# Altium PCB praline.PcbDoc (part 6 of 8)
Units mm, origin at the board's own origin, x right, y up, seen from the top; angles counter-clockwise.
Board outline 152.4 x 101.6 mm, 6 copper layers (In2.Cu, F.Cu, B.Cu, In1.Cu, In3.Cu, In4.Cu); 581 components, 490 nets, 2812 pads, 953 vias.
Unrouted connection lines stored in the file: 404.
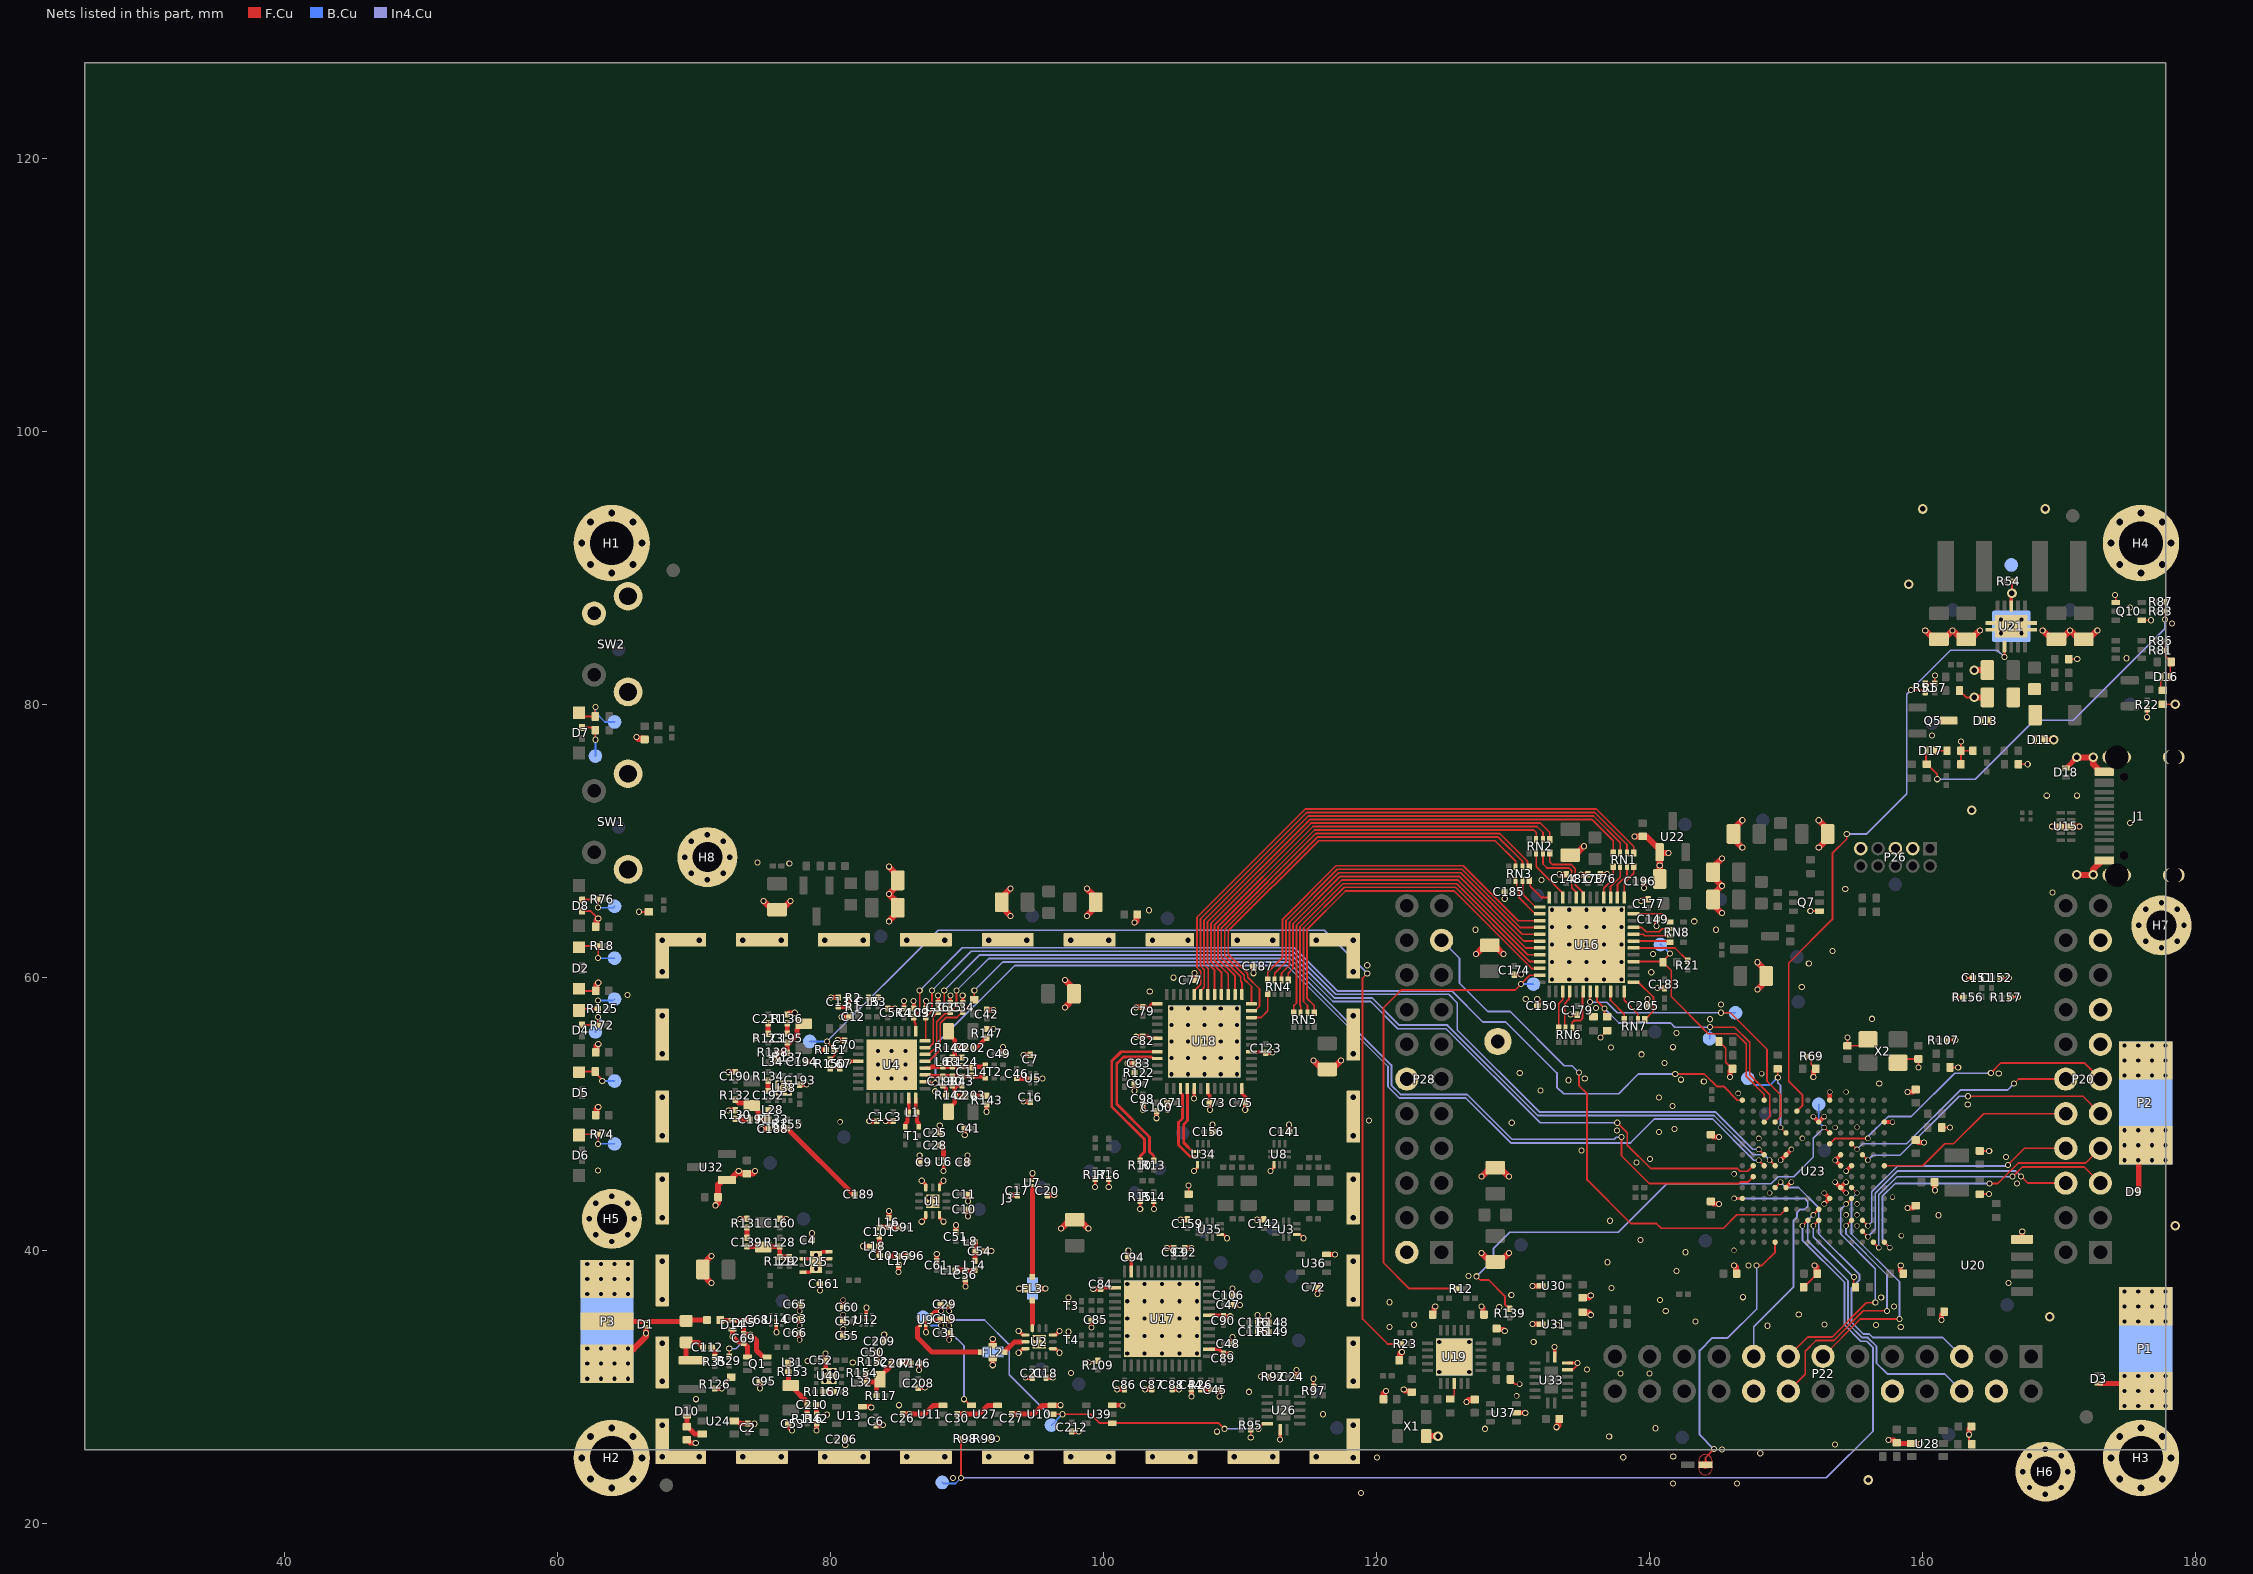
[diagram p8: the nets of this part, all layers, seen from the top]

## Via types
v1: diameter 0.45, hole 0.3, F.Cu to B.Cu, tented both sides, 751 vias
v2: diameter 0.4, hole 0.3, F.Cu to B.Cu, tented both sides, 119 vias
v3: diameter 0.7, hole 0.4, F.Cu to B.Cu, tented both sides, 83 vias

## Nets (pads, with @x,y where several pads share a name; then routed paths per layer and width w, separated by ;. In a path a pad name is that pad's centre, name@x,y a point inside that pad or via, vN(x,y) a via of type N, cw(c..) or ccw(c..) an arc to the next point about the centre after c; other vN are vias at no path point) (continued)
DA7: RN4.5 U18.22 | length 2.7
  F.Cu w0.127: U18.22@110.85,57.07 111.55,57.07 112.05,57.57 RN4.5@112.05,58.82
DBGEN: R64.1 TP24.1 U23.K4 | length 7.6
  F.Cu w0.127: v1(149.4,52.69) R64.1@149.4,53.31 ; v2(149.6,49.02) U23.K4@150,48.62
  In4.Cu w0.127: v1(149.4,52.69) 149.4,52.3 149.6,52.1 v2(149.6,49.02)
  B.Cu w0.127: TP24.1@147.2,52.62 147.69,52.13 148.84,52.13 v1(149.4,52.69)
DD0: RN3.7 U18.23 | length 32
  F.Cu w0.127: U18.23@110.85,57.57 111.11,57.57 111.441,57.901 111.441,59.16 110.58,60.02 110.58,60.268 109.154,61.694 109.154,63.416 115.768,70.03 128.69,70.03 130.2,68.52 RN3.7@130.2,68.12
DD1: RN3.6 U18.24 | length 32
  F.Cu w0.127: U18.24@110.85,58.07 110.85,59.35 110.32,59.88 110.32,60.169 108.9,61.589 108.9,63.521 115.669,70.29 128.93,70.29 130.7,68.52 RN3.6@130.7,68.12
DD2: RN3.5 U18.25 | length 32.1
  F.Cu w0.127: U18.25@110.15,58.77 110.15,59.641 110.06,59.731 110.06,60.07 108.645,61.485 108.645,63.625 115.57,70.55 129.04,70.55 131.07,68.52 131.07,68.25 RN3.5@131.2,68.12
DD3: RN2.7 U18.26 | length 32.3
  F.Cu w0.127: U18.26@109.65,58.77 109.65,60.12 108.39,61.38 108.39,63.73 115.468,70.808 131.512,70.808 131.7,70.62 RN2.7@131.7,70.12
DD4: RN2.6 U18.27 | length 33.2
  F.Cu w0.127: U18.27@109.15,58.77 109.15,60.26 108.135,61.275 108.135,63.845 115.352,71.062 131.758,71.062 132.2,70.62 RN2.6@132.2,70.12
DD5: RN2.5 U18.28 | length 34.2
  F.Cu w0.127: U18.28@108.65,58.77 108.65,60.4 107.881,61.169 107.881,63.981 115.216,71.316 132.004,71.316 132.7,70.62 RN2.5@132.7,70.12
DD6: RN1.8 U18.29 | length 39.9
  F.Cu w0.127: U18.29@108.15,58.77 108.15,60.54 107.626,61.064 107.626,64.086 115.11,71.57 135.8,71.57 137.35,70.02 RN1.8@137.35,69.12
DD7: RN1.7 U18.30 | length 40.8
  F.Cu w0.127: U18.30@107.65,58.77 107.65,59.04 107.69,59.08 107.69,60.64 107.371,60.959 107.371,64.191 115.01,71.83 135.9,71.83 137.85,69.88 RN1.7@137.85,69.12
DD8: RN1.6 U18.31 | length 41.8
  F.Cu w0.127: U18.31@107.15,58.77 107.15,59.03 107.4,59.28 107.4,60.56 107.116,60.844 107.116,64.306 114.9,72.09 136,72.09 138.35,69.74 RN1.6@138.35,69.12
DD9: RN1.5 U18.32 | length 42.9
  F.Cu w0.127: U18.32@106.65,58.77 106.65,59.03 107.14,59.52 107.14,60.46 106.859,60.741 106.859,64.419 114.79,72.35 136.1,72.35 138.85,69.6 RN1.5@138.85,69.12
DIRECTION: RN7.2 U16.12 | length 2.5
  F.Cu w0.127: U16.12@138.15,58.983 138.15,58.33 139.15,57.33 RN7.2@139.15,56.92
DISABLE: RN8.1 U16.23 | length 2.9
  F.Cu w0.127: U16.23@138.837,64.67 140.9,64.67 RN8.1@141.5,64.07
FPGA_CLK: R12.1 TP65.1 U16.47 | length 38.2
  F.Cu w0.127: R12.1@125.88,37.22 122.41,37.22 120.52,39.11 120.52,57.79 121.82,59.09 130.16,59.09 131.24,60.17 U16.47@131.963,60.17
  B.Cu w0.127: v1(130.6,59.53) 131.49,59.53 TP65.1@131.5,59.52
FPGA_CONFIG.CDONE: R45.1 TP48.1 U16.7 U23.L3 | length 23.3
  F.Cu w0.127: U16.7@135.65,58.983 v1(135.65,58.2) 135.65,57.38 R45.1@135.9,57.13 ; v1(145.25,57.42) 145.93,57.42 148.61,54.74 148.61,52.41 149.6,51.42 149.6,49.82 U23.L3@149.2,49.42
  In4.Cu w0.127: v1(135.65,58.2) 136.87,58.2 137.65,57.42 v1(145.25,57.42)
  B.Cu w0.127: v1(145.25,57.42) TP48.1@146.3,57.42
FPGA_CONFIG.{\C\R\E\S\E\T\}\: R40.1 TP50.1 U16.8 U23.M3 | length 21.3
  F.Cu w0.127: U16.8@136.15,58.983 136.15,58.29 v1(136.7,57.74) 136.7,57.33 R40.1@136.9,57.13 ; v1(144.42,56.37) 146.23,56.37 147.34,55.26 147.34,52.88 148.8,51.42 148.8,49.82 U23.M3@148.4,49.42
  In4.Cu w0.127: v1(136.7,57.74) 137.77,56.67 141.55,56.67 141.85,56.37 v1(144.42,56.37)
  B.Cu w0.127: TP50.1@144.4,55.52 144.42,55.54 v1(144.42,56.37)
FPGA_CONFIG.{\S\P\I\_\C\S\}\: R44.1 TP49.1 U16.16 U23.M1 | length 18.4
  F.Cu w0.127: U16.16@138.837,61.17 140.94,61.17 R44.1@140.99,61.12 ; v1(141.51,61.75) 140.99,61.23 R44.1@140.99,61.12 ; U23.M1@148.4,51.02 148.4,51.44 147.08,52.76 147.08,55.15 146.34,55.89 144.31,55.89 141.59,58.61 141.59,60.52 R44.1@140.99,61.12
  B.Cu w0.127: TP49.1@140.8,62.42 140.84,62.42 v1(141.51,61.75)
FPGA_DA0: RN5.1 U16.46 | length 26.9
  F.Cu w0.127: RN5.1@115.45,57.42 115.45,57.95 114.91,58.49 114.91,63.51 117.74,66.34 125.69,66.34 131.36,60.67 U16.46@131.963,60.67
FPGA_DA1: RN5.2 U16.45 | length 27.1
  F.Cu w0.127: RN5.2@114.95,57.42 114.95,57.95 114.656,58.244 114.656,63.626 117.64,66.61 125.79,66.61 131.23,61.17 U16.45@131.963,61.17
FPGA_DA2: RN5.3 U16.44 | length 27.4
  F.Cu w0.127: RN5.3@114.45,57.42 114.45,57.94 114.4,57.99 114.4,63.73 117.55,66.88 125.88,66.88 131.09,61.67 U16.44@131.963,61.67
FPGA_DA3: RN5.4 U16.43 | length 27.8
  F.Cu w0.127: RN5.4@113.978,57.448 RN5.4@113.95,57.42 113.95,57.94 114.146,58.136 114.146,63.836 117.46,67.15 125.97,67.15 130.95,62.17 U16.43@131.963,62.17
FPGA_DA4: RN4.1 U16.42 | length 25.7
  F.Cu w0.127: RN4.1@113.55,59.82 113.55,60.32 113.892,60.662 113.892,63.942 117.36,67.41 126.07,67.41 130.81,62.67 U16.42@131.963,62.67
FPGA_DA5: RN4.2 U16.41 | length 26.2
  F.Cu w0.127: RN4.2@113.05,59.82 113.05,60.32 113.638,60.908 113.638,64.058 117.25,67.67 126.17,67.67 130.67,63.17 U16.41@131.963,63.17
FPGA_DA6: RN4.3 U16.40 | length 26.6
  F.Cu w0.127: RN4.3@112.55,59.82 112.55,60.32 113.383,61.153 113.383,64.173 117.14,67.93 126.27,67.93 130.53,63.67 U16.40@131.963,63.67
FPGA_DA7: RN4.4 U16.39 | length 27
  F.Cu w0.127: RN4.4@112.05,59.82 112.05,60.4 113.128,61.478 113.128,64.278 117.04,68.19 126.37,68.19 130.39,64.17 U16.39@131.963,64.17
FPGA_DD0: RN3.2 U16.38 | length 3.4
  F.Cu w0.127: RN3.2@130.2,67.12 130.28,67.04 130.28,66.654 130.45,66.484 130.45,65.84 131.62,64.67 U16.38@131.963,64.67
FPGA_DD1: RN3.3 U16.37 | length 2.7
  F.Cu w0.127: RN3.3@130.7,67.12 130.71,67.11 130.71,66.11 131.65,65.17 U16.37@131.963,65.17
FPGA_DD2: RN3.4 U16.36 | length 2.2
  F.Cu w0.127: RN3.4@131.2,67.12 131.27,67.05 131.27,66.7 132.112,65.857 U16.36@132.65,65.857
FPGA_DD3: RN2.2 U16.34 | length 4.2
  F.Cu w0.127: RN2.2@131.65,69.12 RN2.2@131.77,69 ; RN2.2@131.7,69.12 131.7,68.12 133.65,66.17 U16.34@133.65,65.857
FPGA_DD4: RN2.3 U16.32 | length 5.2
  F.Cu w0.127: RN2.3@132.2,69.12 132.2,68.32 132.5,68.02 134.12,68.02 134.31,67.83 134.31,66.58 134.65,66.24 U16.32@134.65,65.857
FPGA_DD5: RN2.4 U16.31 | length 5.1
  F.Cu w0.127: RN2.4@132.7,69.12 132.7,68.47 132.89,68.28 134.27,68.28 134.57,67.98 134.57,66.79 135.15,66.21 U16.31@135.15,65.857
FPGA_DD6: RN1.1 U16.28 | length 2.6
  F.Cu w0.127: U16.28@136.65,65.857 136.65,66.53 137.35,67.23 RN1.1@137.35,68.12
FPGA_DD7: RN1.2 U16.27 | length 2.6
  F.Cu w0.127: U16.27@137.15,65.857 137.15,66.67 137.85,67.37 RN1.2@137.85,68.12
FPGA_DD8: RN1.3 U16.26 | length 2.6
  F.Cu w0.127: U16.26@137.65,65.857 137.65,66.8 138.35,67.5 RN1.3@138.35,68.12
FPGA_DD9: RN1.4 U16.25 | length 2.6
  F.Cu w0.127: U16.25@138.15,65.857 138.15,66.93 138.85,67.63 RN1.4@138.85,68.12
FPGA_SGPIO0: RN8.2 U16.21 | length 2.9
  F.Cu w0.127: U16.21@138.837,63.67 139.44,63.67 139.76,63.35 140.71,63.35 140.93,63.57 RN8.2@141.5,63.57
FPGA_SGPIO1: RN8.4 U16.19 | length 2.7
  F.Cu w0.127: U16.19@138.837,62.67 141.4,62.67 RN8.4@141.5,62.57
FPGA_SGPIO2: RN6.2 U16.6 | length 3.3
  F.Cu w0.127: RN6.2@134.35,56.32 134.35,56.72 134.48,56.85 134.94,56.85 135.1,57.01 135.1,58.932 U16.6@135.15,58.983
FPGA_SGPIO3: RN7.1 U16.13 | length 3.8
  F.Cu w0.127: U16.13@138.837,59.67 139.19,59.67 140.29,58.57 140.29,57.56 RN7.1@139.65,56.92
FPGA_SGPIO4: RN7.4 U16.10 | length 2.5
  F.Cu w0.127: U16.10@137.15,58.983 137.15,58.32 138.15,57.32 RN7.4@138.15,56.92
FPGA_SGPIO5: RN6.4 U16.3 | length 2.8
  F.Cu w0.127: RN6.4@133.35,56.32 133.35,58.086 133.65,58.386 U16.3@133.65,58.983
FPGA_SGPIO6: RN6.3 U16.4 | length 2.8
  F.Cu w0.127: RN6.3@133.85,56.32 133.79,56.38 133.79,58.09 134.1,58.4 134.1,58.932 U16.4@134.15,58.983
FPGA_SGPIO7: R21.1 U16.18 | length 4.3
  F.Cu w0.127: U16.18@138.837,62.17 141.87,62.17 R21.1@142.8,61.24
FPGA_SGPIO8: RN8.3 U16.20 | length 2.7
  F.Cu w0.127: U16.20@138.837,63.17 139.55,63.17 139.65,63.07 RN8.3@141.5,63.07
GND: C1.2 C2.2 C3.2 C4.1 C5.2 C6.1 C7.2 C8.2 C9.1 C10.2 C11.1 C12.2 C13.2 C16.1 C17.2 C18.1 C19.1 C20.1 C21.2 C22.2 C23.2 C24.2 C25.2 C26.2 C27.2 C29.1 C30.2 C31.2 C32.2 C33.2 C34.2 C35.2 C36.2 C37.2 C39.2 C40.2 C41.2 C42.2 C43.2 C44.1 C45.1 C47.1 C48.2 C49.1 C51.2 C52.2 C53.2 C54.2 C55.1 C56.2 C57.1 C60.2 C61.2 C63.1 C65.1 C66.2 C69.2 C70.2 C71.2 C72.2 C73.2 C75.2 C77.2 C79.2 C80.2 C81.2 C82.2 C83.2 C84.2 C85.2 C86.2 C87.2 C88.2 C89.2 C90.2 C92.2 C93.2 C94.2 C95.2 C97.2 C98.2 C100.2 C105.2 C106.2 C109.2 C110.2 C113.2 C116.2 C117.2 C118.2 C119.2 C120.2 C121.2 C122.2 C123.2 C124.2 C126.2 C127.2 C128.2 C129.2 C130.2 C131.2 C132.2 C133.2 C134.2 C135.2 C136.2 C137.2 C138.2 C140.2 C141.2 C142.2 C143.2 C144.2 C145.1 C146.1 C147.2 C148.2 C149.2 C150.2 C151.2 C152.2 C154.2 C156.2 C157.2 C158.2 C159.2 C160.2 C161.2 C162.2 C163.2 C164.2 C165.2 C166.2 C167.2 C168.1 C169.2 C170.2 C171.2 C172.2 C173.2 C174.2 C175.2 C176.2 C177.2 C178.2 C179.2 C181.2 C182.2 C183.2 C184.2 C185.2 C186.2 C187.2 C188.2 C190.2 C193.2 C194.2 C196.2 C197.2 C199.2 C200.2 C201.2 C204.2 C205.2 C206.2 C208.2 C209.2 C212.2 D1.2 D2.1 D3.2 D8.2 D9.2 D11.2 D14.2 D18.2 FL2.2 FL2.4 FL3.2 FL3.4 H1.1 H2.1 H3.1 H4.1 H5.1 H6.1 H7.1 H8.1 J1.A1 J1.A12 J1.B1 J1.B12 J1.S1 J3.1 L16.2 L17.2 L18.2 P1.2 P2.2 P3.2 P20.13 P20.15 P20.19 P22.4 P22.10 P22.18 P26.3 P26.5 P26.9 P28.2 P28.12 Q1.1 Q7.1 Q10.1 Q10.4 R4.1 R7.2 R14.2 R15.2 R16.2 R17.2 R20.2 R22.2 R39.2 R40.2 R42.1 R46.1 R51.2 R54.1 R55.1 R57.2 R65.1 R68.2 R69.2 R79.2 R80.2 R82.1 R85.1 R89.2 R91.2 R92.2 R93.2 R95.2 R97.2 R99.2 R101.2 R107.2 R109.2 R113.2 R122.2 R126.1 R130.1 R131.1 R136.1 R143.1 R146.1 R147.2 R148.2 R151.2 R156.2 R157.2 SW1.SH SW2.2 SW2.SH T3.1 T4.1 TP6.1 TP23.1 U1.4 U1.6 U1.10 U1.12 U1.13 U2.4 U2.6 U2.10 U2.12 U2.13 U3.3 U4.12 U4.33 U5.2 U6.2 U7.2 U8.3 U9.6 U9.9 U10.3 U11.3 U12.6 U12.9 U13.3 U14.6 U14.9 U15.3 U15.8 U16.49 U17.2 U17.26 U17.31 U17.47 U17.49 U18.5 U18.7 U18.12 U18.17 U18.37 U18.42 U18.49 U19.21 U20.4 U21.8 U21.11 U22.1 U23.A3 U23.D7 U23.E6 U23.E7 U23.E9 U23.F1 U23.F10 U23.G3 U23.K6 U23.K9 U24.2 U25.3 U25.4 U25.6 U25.8 U25.9 U26.7 U27.3 U28.2 U30.2 U31.2 U32.1 U33.6 U33.7 U33.8 U34.3 U35.3 U36.3 U37.2 U38.7 U39.3 U40.7 X1.2 X2.2 X2.4 | length 269.8
  F.Cu w0.127: D2.1@61.6,59.173 61.753,59.02 C81.2@62.82,59.02 ; D8.2@61.82,64.87 62.46,64.87 v1(63.01,64.32) ; C124.2@62.7,50.04 C124.2@62.82,49.92 ; v1(66,64.82) 66.01,64.81 R7.2@66.7,64.81 ; v1(72.05,29.92) 72.05,30.02 72.75,30.72 R20.2@72.75,30.73 ; R99.2@91.62,26.22 v1(92.2,26.22) ; v1(98.9,31.8) 99.46,31.8 R109.2@99.6,31.94 ; R122.2@102.28,53.02 C83.2@102.28,53.72 ; R113.2@106.25,44.13 v1(106.25,44.77) ; v1(110.8,26.32) R95.2@110.8,26.9 ; v1(111.55,30.77) R92.2@112.13,30.77 ; R97.2@115.4,30.04 v1(115.4,30.62) ; R85.1@129.81,30.57 130.16,30.22 v2(130.49,30.22) ; U33.6@133.988,31.27 134.39,31.27 134.72,31.6 v1(134.72,31.77) ; v1(136.4,55.6) 136.4,55.61 R40.2@136.9,56.11 ; R68.2@145.09,55.32 145.59,54.82 145.59,53.81 C128.2@146.08,53.32 ; R93.2@151.29,37.32 151.29,37.33 C135.2@152.28,38.32 ; R69.2@151.58,54.22 151.84,53.96 151.84,53.66 C133.2@152.18,53.32 ; v1(151.78,64.87) Q7.1@152.45,64.87 ; v1(154.5,55.62) C158.2@154.5,55 155.63,55 X2.2@156,55.37 ; X2.4@158.2,53.67 158.57,54.04 C157.2@159.7,54.04 v1(159.7,53.42) ; R51.2@160.2,81.54 R57.2@160.9,81.54 v1(160.9,82.12) ; R39.2@161.41,49.02 v1(162,49.02) ; R107.2@161.82,55.42 v1(162.4,55.42) ; R82.1@162.01,53.42 v1(162.61,53.42) ; v1(162.4,58.57) R156.2@162.98,58.57 ; R46.1@162.71,81.02 163.21,80.52 v3(163.8,80.52) ; R80.2@162.81,75.62 R91.2@162.81,76.62 ; v1(162.81,77.29) R91.2@162.81,76.62 ; v1(163.08,59.97) C151.2@163.68,59.97 ; v1(163.4,26.52) 163.4,26.03 R101.2@163.61,25.82 ; R79.2@163.69,76.62 R91.2@162.81,76.62 ; C118.2@164.2,44.14 v1(164.87,44.14) ; C164.2@164.2,47.3 v1(164.88,47.3) ; C152.2@165.72,59.97 v1(166.31,59.97) ; R157.2@166.42,58.57 v1(167,58.57) ; v3(166.55,88.14) 166.55,88.95 R54.1@166.62,89.02 ; R65.1@167.02,75.62 v1(167.7,75.62) ; R55.1@170.71,83.32 v1(171.33,83.32) ; v1(174.09,88.03) 174.15,87.97 Q10.4@174.15,87.47 ; Q10.1@176.05,86.17 v1(176.73,86.17) ; v1(176.45,79.07) R22.2@176.45,79.65 ; R89.2@177.6,80.01 178.49,80.01 v3(178.5,80.02)
  F.Cu w0.203: C66.2@77.77,33.97 C66.2@77.87,34.07 ; v1(99.4,44.66) R17.2@99.4,45.24 ; v1(100.4,44.66) R16.2@100.4,45.24 ; v1(102.7,43.06) R15.2@102.7,43.64 ; v1(103.7,43.06) R14.2@103.7,43.64 ; v1(106.64,45.82) 106.9,46.08 U34.3@106.9,46.301 ; U35.3@108.569,41.17 108.79,41.17 v1(109.05,40.91) ; v1(112.24,45.82) 112.5,46.08 U8.3@112.5,46.301 ; U3.3@114.168,41.17 114.39,41.17 v1(114.65,40.91)
  F.Cu w0.25: v1(76.05,34.02) U14.6@76.05,34.52 U14.9@76.05,34.92 ; U25.8@78,38.42 78.49,38.42 78.95,38.88 U25.9@78.95,39.17 ; U25.6@78,39.42 78.7,39.42 U25.9@78.95,39.17 ; U25.3@79.9,39.42 79.2,39.42 U25.9@78.95,39.17 ; U25.4@79.9,39.92 79.41,39.92 78.95,39.46 U25.9@78.95,39.17 ; v1(81.33,53.87) U4.12@82.05,53.87 ; U12.9@82.65,34.92 U12.6@82.65,35.32 v1(82.65,35.82) ; R4.1@85.4,57.74 v1(85.4,58.28) ; C109.2@86.1,57.74 v1(86.1,58.28) ; v1(86.7,42.12) 87,42.42 U1.10@87,42.62 ; v1(86.7,45.12) 87,44.82 U1.6@87,44.62 ; v1(87,34.02) U9.6@87,34.52 U9.9@87,34.92 ; C37.2@87,57.74 v1(87,58.28) ; C36.2@87.9,58.14 v1(87.9,58.68) ; U1.12@88,42.62 88,42.42 v1(88.3,42.12) ; U1.4@88,44.62 88,44.82 v1(88.3,45.12) ; v1(88.3,45.82) U6.2@88.3,46.32 ; C35.2@88.8,58.14 v1(88.8,58.68) ; C34.2@89.7,58.14 v1(89.7,58.68) ; v1(93.8,32.52) 94.1,32.82 U2.12@94.3,32.82 ; v1(93.8,34.12) 94.1,33.82 U2.10@94.3,33.82 ; U7.2@94.8,45.17 v1(94.8,45.67) ; U5.2@95.05,52.62 v1(95.55,52.62) ; U2.4@96.3,32.82 96.5,32.82 v1(96.8,32.52) ; U2.6@96.3,33.82 96.5,33.82 v1(96.8,34.12) ; C84.2@99.8,37.2 99.87,37.27 U17.2@100.863,37.27 ; C94.2@101.83,39.52 101.83,39.44 102.05,39.22 U17.47@102.05,38.457 ; C82.2@102.9,55.69 103.31,55.69 103.43,55.57 U18.42@103.95,55.57 ; C79.2@102.9,57.84 103.34,57.84 103.57,58.07 U18.37@103.95,58.07 ; v1(106.63,51.15) 106.65,51.17 U18.5@106.65,51.87 ; U18.7@107.65,51.87 107.65,51.5 107.78,51.37 C73.2@107.78,50.82 ; U17.26@107.737,32.77 108.47,32.77 C89.2@108.8,32.44 ; U17.31@107.737,35.27 108.72,35.27 C90.2@108.8,35.19 ; U18.12@110.15,51.87 110.15,51.52 110.42,51.25 C75.2@110.42,50.82 ; U18.17@110.85,54.57 111.83,54.57 C123.2@111.9,54.5 ; v1(112.95,26.17) U26.7@112.95,26.882 ; U33.8@133.05,32.207 v1(133.05,32.94) ; U33.7@133.988,31.77 v1(134.72,31.77) ; U21.8@166.5,87.22 166.5,88.09 v3(166.55,88.14)
  F.Cu w0.3: v1(91.45,50.17) R143.1@91.45,50.7 ; R147.2@91.45,56.24 91.47,56.22 v1(91.95,56.22) ; v1@97.46,33.88 v1(97.46,34.06) ; v1@97.46,36.38 v1(97.46,36.56) ; v2(149.6,46.62) U23.K6@150,47.02 v2(150.4,47.42) ; U23.K9@150,44.62 v2(150.4,45.02) ; v2(152,49.82) U23.G3@152.4,49.42 v2(152.8,49.82) ; v2(152.8,43.42) U23.F10@153.2,43.82 v2(152.8,44.22) ; U23.F1@153.2,51.02 v2(153.2,51.62) ; v2(153.6,45.02) U23.E9@154,44.62 ; U23.E7@154,46.22 v2(153.6,46.62) U23.E6@154,47.02 ; v2(154.4,44.22) U23.E9@154,44.62 ; v2(154.4,45.02) U23.E9@154,44.62 ; v2(154.4,45.82) U23.D7@154.8,46.22 ; U23.A3@157.2,49.42 v2(157.8,49.42)
  F.Cu w0.35: U39.3@100.65,28.67 v1(101.4,28.67) ; v1(102.4,55.66) 102.43,55.69 C82.2@102.9,55.69 ; v1(102.4,57.81) 102.43,57.84 C79.2@102.9,57.84 ; C71.2@104.68,50.82 104.68,50.35 v1(104.71,50.32) ; v1(106.69,60.32) 106.72,60.29 C77.2@106.72,59.82 ; C73.2@107.78,50.82 107.78,50.35 v1(107.81,50.32) ; v1(110.39,50.32) 110.42,50.35 C75.2@110.42,50.82 ; C123.2@111.9,54.5 112.37,54.5 v1(112.4,54.53) ; C174.2@130.1,60.2 130.15,60.25 130.58,60.25 v1(130.6,60.23) ; U37.2@130.25,28.12 v1(130.9,28.12) ; v1(131.43,34.62) U31.2@132.05,34.62 ; v1(131.43,37.42) U30.2@132.05,37.42 ; v1(131.78,58.43) 131.83,58.38 131.83,57.98 C150.2@131.79,57.94 ; v1(133.42,67.57) 133.47,67.52 133.87,67.52 C148.2@133.92,67.57 ; v1(134.21,57.3) 134.23,57.32 134.66,57.32 C179.2@134.71,57.27 ; v1(134.99,67.54) 135.01,67.52 135.44,67.52 C178.2@135.49,67.57 ; C176.2@136.4,67.57 136.89,67.57 v1(136.9,67.58) ; v1(139.4,65.61) 139.48,65.69 139.85,65.69 C177.2@139.9,65.74 ; v1(140.52,63.77) 140.5,63.79 140.5,64.22 C149.2@140.55,64.27 ; v1(140.6,59.23) 140.62,59.25 141.05,59.25 C183.2@141.1,59.2
  F.Cu w0.364: C171.2@69.5,26.14 69.72,25.92 v1(70.15,25.92) ; R126.1@71.55,29.9 71.57,29.92 v1(72.05,29.92) ; v1(72.55,50.27) 72.57,50.29 R130.1@73.05,50.29 ; v1(72.55,53.07) 73.03,53.07 C190.2@73.05,53.09 ; 72.85,34.06 v1(72.85,33.72) 73.28,33.29 73.61,33.29 C69.2@73.65,33.25 73.938,32.962 Q1.1@73.938,32.28 ; U24.2@72.96,27.52 73.2,27.52 73.38,27.34 C2.2@73.95,27.34 73.97,27.32 v1(74.45,27.32) ; v1(73.4,42.32) 73.88,42.32 R131.1@73.9,42.34 ; C95.2@74.83,30.42 74.85,30.4 v1(74.85,29.92) ; v1(74.95,48.92) C188.2@75.48,48.92 ; C160.2@76.3,42.34 76.32,42.32 v1(76.8,42.32) ; R136.1@76.85,57.29 76.98,57.42 v1(77.4,57.42) ; C53.2@76.93,27.32 76.93,27.09 v1(77.2,26.82) ; v2(77.75,33.47) 77.75,33.95 C66.2@77.77,33.97 ; v2(77.75,34.52) 77.75,35 C63.1@77.77,35.02 ; v2(77.75,35.57) 77.75,36.05 C65.1@77.77,36.07 ; C193.2@77.75,52.15 77.77,52.17 v1(78.25,52.17) ; C194.2@78.22,53.82 v1(78.75,53.82) ; v1(78.65,41.27) 78.65,40.79 C4.1@78.67,40.77 ; v1(79,26.82) R42.1@79,27.35 ; v1(79.15,54.72) R151.2@79.68,54.72 ; C161.2@79.23,37.57 79.25,37.55 v1(79.25,37.07) ; v1(79.65,32.47) 79.65,31.99 C52.2@79.67,31.97 79.67,31.05 U40.7@79.9,30.82 ; v1(80.06,58.54) C13.2@80.6,58.54 ; v1(80.55,55.42) 81.02,55.42 C70.2@81.05,55.39 ; v1(80.84,57.12) C12.2@81.38,57.12 ; C55.1@80.93,33.77 80.95,33.79 v2(80.95,34.27) ; C57.1@80.93,34.82 80.95,34.84 v2(80.95,35.32) ; C60.2@80.93,35.87 80.95,35.89 v2(80.95,36.37) ; v1(81.1,25.77) 81.1,26.15 C206.2@81.12,26.17 ; U13.3@82.35,28.57 82.95,28.57 v1(83,28.52) ; v1(82.41,40.32) L18.2@82.93,40.32 ; v1(82.86,49.5) C1.2@83.4,49.5 ; C6.1@83.35,27.2 83.37,27.22 v1(83.85,27.22) ; C209.2@83.92,33.37 83.92,33.84 v1(83.95,33.87) ; v1(84.06,49.5) C3.2@84.6,49.5 ; C5.2@84.2,57.74 v1(84.74,57.74) ; L16.2@84.3,42.39 v1(84.3,42.91) ; v1(85,38.43) L17.2@85,38.95 ; C26.2@85.3,28.04 85.32,28.02 v1(85.8,28.02) 86.9,28.02 87.55,28.67 U11.3@88.25,28.67 ; C208.2@86.45,29.95 86.47,29.97 v1(86.95,29.97) ; v1(86.5,31.27) 86.52,31.29 R146.1@86.52,31.77 ; C9.1@86.53,46.47 86.55,46.49 v1(86.55,46.97) ; C61.2@87.8,39.24 v1(87.8,39.76) ; C25.2@88.02,48.62 v1(88.02,49.16) ; v2(88.7,33.47) 88.7,33.95 C31.2@88.72,33.97 ; v2(88.7,34.52) 88.7,35 C19.1@88.72,35.02 ; v2(88.7,35.57) 88.7,36.05 C29.1@88.72,36.07 ; C51.2@89.2,41.34 v1(89.2,41.86) ; C30.2@89.3,28.04 89.32,28.02 v1(89.8,28.02) 90.9,28.02 91.55,28.67 U27.3@92.25,28.67 ; C41.2@89.83,48.97 89.85,48.95 v1(89.85,48.47) ; v1@89.9,37.38 C56.2@89.9,37.9 ; v1(90.05,46.97) 90.05,46.49 C8.2@90.07,46.47 ; v1(90.1,42.52) 90.1,43 C10.2@90.12,43.02 ; v1(90.1,43.62) 90.1,44.1 C11.1@90.12,44.12 ; C54.2@91.27,39.97 v1(91.79,39.97) ; C42.2@91.45,57.64 91.47,57.62 v1(91.95,57.62) ; v1(92.65,54.92) 92.65,54.44 C49.1@92.67,54.42 ; v1(93.2,44.07) 93.68,44.07 C17.2@93.7,44.05 ; C27.2@93.3,28.04 93.32,28.02 v1(93.8,28.02) 94.9,28.02 95.55,28.67 U10.3@96.25,28.67 96.86,28.67 v1(96.87,28.68) ; v1(94.15,50.92) 94.63,50.92 C16.1@94.65,50.9 ; v1(94.15,54.32) 94.63,54.32 C7.2@94.65,54.34 ; v1(94.3,30.72) 94.78,30.72 C21.2@94.8,30.7 ; C18.1@95.8,30.7 95.82,30.72 v1(96.3,30.72) ; C20.1@95.9,44.05 95.92,44.07 v1(96.4,44.07) ; C212.2@97.7,26.75 97.72,26.77 v1(98.2,26.77) ; v1(99.13,34.38) C85.2@99.13,34.92 ; v1(99.26,37.2) C84.2@99.8,37.2 ; v1(101.01,29.85) C86.2@101.55,29.85 ; v1(101.78,53.72) C83.2@102.28,53.72 ; C94.2@101.83,39.52 v1(101.83,40.02) ; v1(102.28,51.71) C97.2@102.28,52.21 ; v1(102.9,50.3) C98.2@102.9,50.8 ; v1(103.05,29.85) C87.2@103.55,29.85 ; v1(103.9,49.7) C100.2@103.9,50.2 ; v1(104.65,40.19) C93.2@105.15,40.19 ; C88.2@105.05,29.85 v1(105.55,29.85) ; v1(105.65,42.26) 106.12,42.26 C159.2@106.15,42.29 ; C92.2@105.95,40.19 v1(106.45,40.19) ; v1(106.45,29.33) C44.1@106.45,29.85 ; v1(107.99,49.22) 107.99,48.75 C156.2@108.02,48.72 ; v1(108.52,29.32) C45.1@108.52,29.82 ; C89.2@108.8,32.44 v1(109.3,32.44) ; C90.2@108.8,35.19 v1(109.3,35.19) ; C48.2@109.47,33.17 v1(109.47,33.67) ; C47.1@109.47,36.02 v1(110,36.02) ; C106.2@109.47,36.72 v1(109.47,37.22) ; C187.2@110.98,60.82 111,60.8 v1(111,60.32) ; v1(111.25,42.26) 111.72,42.26 C142.2@111.75,42.29 ; v1(111.3,35.27) 111.32,35.25 C116.2@111.32,34.77 ; R148.2@112.08,34.77 112.08,35.25 v1(112.1,35.27) ; v1(113.59,49.22) 113.59,48.75 C141.2@113.62,48.72 ; v1(114.15,31.27) 114.15,30.79 C24.2@114.17,30.77 ; v1(115.69,36.82) 115.69,37.29 C72.2@115.72,37.32 ; U36.3@116.35,39.72 116.95,39.72 v1(116.96,39.71) ; v1(122,29.83) 122.1,29.73 122.51,29.73 C113.2@122.6,29.64 ; C122.2@124.12,35.32 124.21,35.41 124.21,35.82 v1(124.31,35.92) ; v1(127.69,35.92) 127.79,35.82 127.79,35.41 C119.2@127.88,35.32 ; C120.2@128.89,34.21 129.3,34.21 v1(129.4,34.11) ; C185.2@129.38,66.27 129.4,66.25 v1(129.4,65.77) ; v1(139.6,66.57) 139.6,67.05 C196.2@139.62,67.07 ; v1(139.85,58.42) 139.85,57.94 C205.2@139.87,57.92 ; C130.2@144.5,43.6 144.68,43.42 v1(145.1,43.42) ; C129.2@144.5,48.5 144.68,48.32 v1(145.1,48.32) ; v1(145.9,52.72) 145.9,53.14 C128.2@146.08,53.32 ; v1(152,52.72) 152,53.14 C133.2@152.18,53.32 ; v1(157.5,26.12) 157.92,26.12 C33.2@158.1,25.94 158.17,25.87 U28.2@159.2,25.87 v1(159.86,25.87) ; v1(158.4,38.92) 158.4,38.5 C137.2@158.58,38.32 ; v1(158.9,43.12) 159.32,43.12 C138.2@159.5,43.3 ; v1(158.9,51.62) 159.32,51.62 C132.2@159.5,51.8 ; C131.2@159.5,48.1 159.68,47.92 v1(160.1,47.92) ; C136.2@160.88,45.02 160.88,44.44 v1(160.9,44.42) ; v1(161.4,34.92) 161.4,35.34 C144.2@161.58,35.52 ; v1(163.4,26.52) 163.4,26.94 C32.2@163.58,27.12 ; U20.4@167.3,40.825 v1(167.3,41.41) ; D11.2@168.9,77.42 v3(169.6,77.42) ; D18.2@170.5,75.37 170.55,75.37 v3(171.3,76.12) ; v3@171.28,67.54 v3(171.3,67.52)
  F.Cu w0.4: v1(91.9,31.61) FL2.4@91.9,32.107 ; FL2.2@91.9,33.032 v1(91.9,33.53) ; v1(93.84,37.22) FL3.4@94.337,37.22 ; FL3.2@95.263,37.22 v1(95.75,37.22) ; D3.2@172.9,30.27 176.3,30.27 P1.2@176.35,30.32 ; D9.2@175.85,44.32 175.85,47.82 P2.2@175.9,47.87
  F.Cu w0.45: C124.2@62.82,49.92 62.87,49.97 62.87,50.38 v1(63.01,50.52) ; C110.2@62.82,54.52 62.87,54.57 62.87,54.98 v1(63.01,55.12) ; C81.2@62.82,59.02 62.87,59.07 62.87,59.48 v1(63.01,59.62) ; C162.2@62.82,63.72 62.87,63.77 62.87,64.18 v1(63.01,64.32) ; P3.2@65.1,32.77 65.57,32.77 66.5,33.7 v1(66.5,33.95) v1@66.5,34.15 ; v1(65.8,77.63) 65.94,77.49 66.35,77.49 C80.2@66.4,77.44 ; v1(71.3,37.62) 70.65,38.27 C200.2@70.65,38.62 70.65,38.97 v1(71.3,39.62) ; v1(71.6,43.32) 71.78,43.5 C22.2@71.78,43.92 71.78,44.84 72.11,45.17 U32.1@72.438,45.17 72.65,45.17 v1(73.3,45.82) 73.48,45.64 C23.2@73.9,45.64 74.32,45.64 v1(74.5,45.82) ; v1(75.1,65.62) 75.75,64.97 C163.2@76.1,64.97 76.45,64.97 v1(77.1,65.62) ; v1(84.3,64.12) 84.95,64.77 C154.2@84.95,65.12 84.95,65.47 v1(84.3,66.12) 84.95,66.77 C105.2@84.95,67.12 84.95,67.47 v1(84.3,68.12) ; v1(93.2,64.52) 92.55,65.17 C170.2@92.55,65.52 92.55,65.87 v1(93.2,66.52) ; v1(96.9,41.62) 97.55,42.27 C201.2@97.9,42.27 98.25,42.27 v1(98.9,41.62) ; v1(97.2,57.82) 97.85,58.47 C204.2@97.85,58.82 97.85,59.17 v1(97.2,59.82) ; v1(98.8,64.52) 99.45,65.17 C169.2@99.45,65.52 99.45,65.87 v1(98.8,66.52) ; v1(102.29,64.02) 102.43,64.16 102.43,64.57 C140.2@102.48,64.62 ; v1(115.4,53.92) 116.05,53.27 C186.2@116.4,53.27 116.75,53.27 v1(117.4,53.92) ; C168.1@120.52,29.12 120.52,29.53 v1(120.71,29.72) ; C121.2@121.67,31.97 121.72,32.02 121.72,32.43 v1(121.86,32.57) ; X1.2@123.65,26.42 124.5,26.42 v3(124.51,26.41) ; v1(126.6,28.92) 126.75,29.07 127.17,29.07 C199.2@127.2,29.1 ; v1(127.3,61.72) 127.95,62.37 C197.2@128.3,62.37 128.65,62.37 v1(129.3,61.72) ; v1(127.7,39.82) 128.35,39.17 C167.2@128.7,39.17 129.05,39.17 v1(129.7,39.82) ; v1(127.7,45.42) 128.35,46.07 C166.2@128.7,46.07 129.05,46.07 v1(129.7,45.42) ; v1(133.197,27.07) 133.33,27.203 133.33,27.62 C39.2@133.38,27.67 ; C117.2@134.2,68.97 134.55,68.97 v1(135.2,69.62) ; C43.2@135.1,35.5 135.15,35.45 135.55,35.45 v1(135.7,35.3) ; C40.2@135.1,36.54 135.15,36.59 135.567,36.59 v1(135.7,36.723) ; v1(138.9,70.34) C173.2@139.5,70.34 139.78,70.34 140.75,69.37 U22.1@140.75,69.182 ; C175.2@140.75,67.22 U22.1@140.75,69.182 ; v1(141.4,69.12) 140.812,69.12 U22.1@140.75,69.182 ; v1(145.3,64.72) 144.65,65.37 C182.2@144.65,65.72 144.65,66.07 v1(145.3,66.72) 144.65,67.37 C181.2@144.65,67.72 144.65,68.07 v1(145.3,68.72) ; v1(146.197,38.92) 146.33,38.787 146.33,38.37 C134.2@146.38,38.32 ; v1(146.8,69.52) 146.15,70.17 C184.2@146.15,70.52 146.15,70.87 v1(146.8,71.52) ; v1(147.9,59.12) 148.55,59.77 C165.2@148.55,60.12 148.55,60.47 v1(147.9,61.12) ; v1(152.097,38.92) 152.23,38.787 152.23,38.37 C135.2@152.28,38.32 ; v1(152.4,69.52) 153.05,70.17 C172.2@153.05,70.52 153.05,70.87 v1(152.4,71.52) ; v1(160.2,85.42) 160.916,84.704 161.2,84.704 161.484,84.704 v1(162.2,85.42) 162.916,84.704 163.2,84.704 163.484,84.704 v1(164.2,85.42) ; v3(163.8,80.52) C143.2@164.75,80.52 ; v3(163.8,82.52) C147.2@164.75,82.52 ; v1(168.8,85.42) 169.45,84.77 C145.1@169.8,84.77 170.15,84.77 v1(170.8,85.42) 171.45,84.77 C146.1@171.8,84.77 172.15,84.77 v1(172.8,85.42) ; v1(169.5,71.07) U15.8@170.087,71.07 U15.3@170.85,71.07 v1(171.5,71.07) ; v3(171.3,67.52) v3(172.5,67.52) 172.5,67.92 173.15,68.57 J1.B12@173.305,68.57 ; v3(171.3,76.12) v3(172.5,76.12) 172.5,75.62 173.05,75.07 J1.B1@173.305,75.07
  other v1: 118.87,22.26 141.73,22.94 146.4,22.94 89,23.36 120.04,24.84 138.08,24.87 141.74,24.92 148.11,25.16 145.31,25.44 153.58,25.81 137.05,26.39 108.33,26.74 127.95,26.95 140.43,26.99 79.77,27.98 116.1,28.02 85.04,28.68 70.17,29.12 110.68,29.66 137.87,30.99 140,30.99 97.63,31.04 135.42,31.29 81.65,31.81 78.35,31.92 131.52,33.31 120.96,34.4 158.4,34.41 148.64,34.5 122.75,34.57 133.27,34.56 156.59,34.56 152.81,34.59 143.38,34.8 150.93,35.32 141.19,35.57 129,35.87 157.9,35.92 120.95,36.22 140.77,36.39 156.97,36.58 146.85,36.59 129.88,36.74 137.23,37.26 89.9,37.37 166.3,37.62 126.75,38.13 141.97,38.5 78.95,38.67 147.26,38.92 136.93,39.15 78.95,39.67 142.65,39.88 139.35,40.79 137.1,42.19 161.17,42.59 166.92,44.92 62.99,45.87 139.06,46.45 140.03,46.71 166.11,46.86 135.01,47.33 140.71,48.7 137.63,48.79 141.84,48.92 77.7,49.27 129.91,49.37 119.45,49.54 141.68,50.6 163.31,50.71 140.7,51.22 87.69,51.67 132.03,51.72 156.83,52.24 143.98,52.38 134.08,52.48 142.31,52.52 135.26,52.61 165.58,52.98 130.5,53.02 141.1,53.73 139.41,54.38 137.19,54.88 141.71,54.9 74.6,55.57 141.98,55.94 144.42,56.95 156.3,56.98 136.09,57.76 145.25,58.02 130.94,58.44 65.16,58.72 103.4,58.97 151.15,59.31 105.13,59.99 140.13,60.39 119.33,60.9 151.67,61.04 140.25,61.73 153.4,61.94 127.27,63.5 144.86,63.5 143.28,64.12 103.35,64.93 169.53,66.22 154.34,66.48 132.09,67.14 140.75,68.21 77,68.36 74.68,68.44 175.2,71.32 169.1,73.32 171.3,73.32 160.7,77.72 174.94,83.39 178.26,85.92 175.2,87.11
  other v2: 130.27,29.36 146.19,40.02 158.45,41.1 155.2,41.82 154.4,42.62 155.2,42.62 155.2,43.42 157.8,43.92 148.8,44.22 146.2,45.62 148,48.22 151.2,48.22 153.6,49.02 155.2,49.04 80.72,49.43 146.5,51.52 154.4,51.62 148.21,52.97
  other v3: 156.02,23.2 118.3,24.82 67.7,24.92 70.4,24.92 73.6,24.92 76.4,24.92 79.6,24.92 82.4,24.92 85.6,24.92 88.4,24.92 91.6,24.92 94.4,24.92 97.6,24.92 100.4,24.92 103.6,24.92 106.4,24.92 109.6,24.92 112.4,24.92 115.6,24.92 67.7,27.22 118.3,27.22 67.7,30.42 118.3,30.42 67.7,33.22 118.3,33.22 169.33,35.15 67.7,36.42 118.3,36.42 67.7,39.22 118.3,39.22 178.5,41.82 67.7,42.42 118.3,42.42 67.7,45.22 118.3,45.22 67.7,48.42 118.3,48.42 67.7,51.22 118.3,51.22 67.7,54.42 118.3,54.42 67.7,57.22 118.3,57.22 67.7,60.42 118.3,60.42 67.7,62.72 70.4,62.72 73.6,62.72 76.4,62.72 79.6,62.72 82.4,62.72 85.6,62.72 88.4,62.72 91.6,62.72 94.4,62.72 97.6,62.72 100.4,62.72 103.6,62.72 106.2,62.72 109.8,62.72 112.4,62.72 115.6,62.72 118.3,62.72 163.6,72.26 159,88.82 160,94.32 169,94.32
GPIO3_8: P20.5 U23.B14 | length 22
  F.Cu w0.127: U23.B14@156.4,40.62 v2(156.8,40.22) ; v1(166.6,45.42) 167.31,46.13 171.85,46.13 P20.5@173.03,44.95
  In4.Cu w0.127: v2(156.8,40.22) 156.8,44.09 158.13,45.42 v1(166.6,45.42)
GPIO3_9: P20.6 U23.C13 | length 19
  F.Cu w0.127: U23.C13@155.6,41.42 v2(156,41.02) ; v1(167.21,45.44) 167.7,44.95 P20.6@170.49,44.95
  In4.Cu w0.127: v2(156,41.02) 156.54,41.56 156.54,44.19 158.19,45.84 166.81,45.84 v1(167.21,45.44)
GPIO3_10: P20.7 U23.A14 | length 22
  F.Cu w0.127: U23.A14@157.2,40.62 v2(157.6,40.22) ; v1(164.91,44.92) 165.5,44.92 167,46.42 171.96,46.42 P20.7@173.03,47.49
  In4.Cu w0.127: v2(157.6,40.22) 157.06,40.76 157.06,43.97 158.01,44.92 v1(164.91,44.92)
GPIO3_11: P20.8 U23.C12 | length 18.7
  F.Cu w0.127: U23.C12@155.6,42.22 v2(156,41.82) ; v1(166.26,46.28) 167.47,47.49 P20.8@170.49,47.49
  In4.Cu w0.127: v2(156,41.82) 156.28,42.1 156.28,44.3 158.18,46.2 166.18,46.2 v1(166.26,46.28)
GPIO3_12: P20.9 U23.C6 | length 20.1
  F.Cu w0.127: U23.C6@155.6,47.02 v2(156,46.62) ; v1(163.32,51.31) 171.75,51.31 P20.9@173.03,50.03
  In4.Cu w0.127: v2(156,46.62) 156.36,46.98 158.35,46.98 162.68,51.31 v1(163.32,51.31)
GPIO3_13: P20.10 U23.A7 | length 14.9
  F.Cu w0.127: U23.A7@157.2,46.22 160.015,46.22 161.615,47.82 162.27,47.82 164.48,50.03 P20.10@170.49,50.03
GPIO3_14: P20.11 U23.F5 | length 22.8
  F.Cu w0.127: U23.F5@153.2,47.82 153.6,48.22 v2(156,48.22) ; v1(165,53) 165.75,53.75 171.85,53.75 P20.11@173.03,52.57
  In4.Cu w0.127: v2(156,48.22) 156,48.34 157.48,49.82 159.18,49.82 162.36,53 v1(165,53)
GPIO3_15: P20.12 U23.D5 | length 18
  F.Cu w0.127: U23.D5@154.8,47.82 v2(155.2,47.42) ; v1(166.69,52.23) 167.03,52.57 P20.12@170.49,52.57
  In4.Cu w0.127: v2(155.2,47.42) 155.6,47.82 158.82,47.82 162.76,51.76 166.22,51.76 v1(166.69,52.23)
I2C1_SCL: P22.5 U23.L9 | length 23.1
  F.Cu w0.127: U23.L9@149.2,44.62 v2(149.6,45.02)
  In4.Cu w0.127: v2(149.6,45.02) 149.993,44.626 150.914,44.626 152.4,43.14 152.4,41.22 155.39,38.23 155.39,37.87 154.8,37.28 154.8,34.76 155.67,33.89 156.1,33.89 156.35,33.64 161.48,33.64 P22.5@162.87,32.25
I2C1_SDA: P22.6 U23.G11 | length 21
  F.Cu w0.127: v2(152,42.62) U23.G11@152.4,43.02
  In4.Cu w0.127: v2(152,42.62) 151.6,42.22 151.6,40.728 154.54,37.788 154.54,34.66 155.57,33.63 156,33.63 156.63,33 156.63,31.76 157.42,30.97 161.61,30.97 P22.6@162.87,29.71
I2S0_RX_SDA: P28.19 U23.K11 | length 39.9
  F.Cu w0.127: v1(134.84,53.04) 134.84,52.08 135.43,51.49 135.43,45.178 138.624,41.984 140.506,41.984 140.85,41.64 145.42,41.64 146.4,42.62 149.6,42.62 U23.K11@150,43.02
  In4.Cu w0.127: P28.19@124.77,62.73 126.09,61.41 126.09,59.588 128.16,57.518 129.802,57.518 133.77,53.55 134.33,53.55 v1(134.84,53.04)
I2S0_RX_WS: P22.15 U23.D10 | length 17
  F.Cu w0.127: P22.15@150.17,32.25 151.594,33.674 153.374,33.674 155.89,36.19 v1(156.54,36.19) ; v2(154.4,43.42) U23.D10@154.8,43.82
  In4.Cu w0.127: v2(154.4,43.42) 154,43.02 154,41.22 156.54,38.68 v1(156.54,36.19)
I2S0_TX_MCLK: P22.17 U23.P10 | length 19.3
  F.Cu w0.127: v2(146.2,43.82) U23.P10@146.8,43.82
  In4.Cu w0.127: v2(146.2,43.82) 151.36,43.82 151.593,43.586 151.593,43.257 151.356,43.02 151.04,43.02 150.8,42.78 150.8,42.44 150.54,42.18 150.54,37.33 147.63,34.42 P22.17@147.63,32.25
I2S0_TX_SCK: P22.16 U23.D12 | length 18.7
  F.Cu w0.127: P22.16@150.17,29.71 151.4,30.94 151.4,32.62 152.2,33.42 153.5,33.42 155.67,35.59 v1(157.4,35.59) ; v2(154.4,41.82) U23.D12@154.8,42.22
  In4.Cu w0.127: v2(154.4,41.82) 154.4,41.22 157.4,38.22 v1(157.4,35.59)
I2S0_TX_SDA: P22.13 U23.D9 | length 18.2
  F.Cu w0.127: P22.13@152.73,32.25 P22.13@152.71,32.25 155.45,34.99 v1(158.32,34.99) ; U23.D9@154.8,44.62 v2(155.2,44.22)
  In4.Cu w0.127: v2(155.2,44.22) 154.8,43.82 154.8,41.22 158.32,37.7 v1(158.32,34.99)
IA+: U18.3 U34.2 | length 5.9
  F.Cu w0.203: U18.3@105.65,51.87 105.65,51.56 105.791,51.419 105.791,49.678 105.511,49.398 105.511,47.742 106.361,46.892 106.71,46.892 U34.2@106.731,46.87
IA-: U18.4 U34.1 | length 5.2
  F.Cu w0.203: U18.4@106.15,51.87 106.169,51.851 106.169,49.522 105.889,49.242 105.889,47.898 106.517,47.27 U34.1@106.781,47.27
ID+: R13.1 U18.45 | length 11.5
  F.Cu w0.203: R13.1@103.7,46.59 103.7,46.935 103.389,47.246 103.389,48.318 100.989,50.718 100.989,53.709 101.47,54.19 103.511,54.19 103.631,54.07 U18.45@103.95,54.07
ID-: R10.1 U18.44 | length 12
  F.Cu w0.203: R10.1@102.7,46.59 102.7,46.935 103.011,47.246 103.011,48.162 100.611,50.562 100.611,53.871 101.31,54.57 U18.44@103.95,54.57
IF: FL3.3 U7.5 | length 6.7
  F.Cu w0.25: 94.8,44.45 U7.5@94.8,44.77
  F.Cu w0.364: FL3.3@94.8,38.082 94.8,44.45
INTR: R104.2 U19.3 | length 1.3
  F.Cu w0.127: R104.2@125.4,29.13 125.7,29.43 U19.3@125.7,30.27
ISP: R59.2 U23.G12 | length 6.3
  F.Cu w0.127: v2(152,41.82) U23.G12@152.4,42.22 ; v1(154.97,38.06) 154.97,37.44 R59.2@155.09,37.32
  In4.Cu w0.127: v2(152,41.82) 152,41.03 v1(154.97,38.06)
LPF_EN: R98.1 TP45.1 U23.H12 | length 90.7
  F.Cu w0.127: v1(89.58,23.36) R98.1@89.58,26.22 ; v2(151.2,41.82) U23.H12@151.6,42.22
  In4.Cu w0.127: v1(89.58,23.36) 152.95,23.36 156.376,26.786 156.376,32.894 155.9,33.37 155.47,33.37 154.28,34.56 154.28,37.689 151.2,40.769 v2(151.2,41.82)
  B.Cu w0.127: TP45.1@88.2,23.02 88.276,22.945 89.172,22.945 89.58,23.352 v1(89.58,23.36)
LPF_OR_MIX_BYPASS: C19.2 TP40.1 U9.8 U27.4 | length 9.7
  F.Cu w0.127: v1(89.8,29.12) 90.25,28.67 U27.4@90.35,28.67
  F.Cu w0.25: U9.8@87.4,34.92 87.98,34.92 C19.2@88.08,35.02
  F.Cu w0.364: C19.2@88.08,35.02 88.1,35 v2(88.1,34.52)
  In4.Cu w0.127: v2(88.1,34.52) 88.7,33.92 88.9,33.92 89.8,33.02 v1(89.8,29.12)
  B.Cu w0.127: TP40.1@86.8,35.12 87.4,34.52 v2(88.1,34.52)
MCU_CLK: R139.1 TP36.1 U23.F4 | length 37.4
  F.Cu w0.127: v1(127.34,38.12) 127.61,37.85 128.23,37.85 129.41,36.67 129.41,36.08 R139.1@129.75,35.74 ; v2(152.8,49.02) U23.F4@153.2,48.62
  In4.Cu w0.127: v1(127.34,38.12) 128.57,39.35 128.57,40.15 129.76,41.34 137.71,41.34 141.27,44.9 148.9,44.9 149.42,45.42 150.56,45.42 152,46.86 152,48.22 v2(152.8,49.02)
  B.Cu w0.127: TP36.1@152.4,50.72 152.4,49.42 v2(152.8,49.02)
MIX_BYPASS: FL2.3 U9.5 | length 6.1
  F.Cu w0.25: 86.4,34.32 U9.5@86.6,34.52
  F.Cu w0.364: 86.4,34.32 86.4,33.62 87.45,32.57 FL2.3@91.037,32.57
MIX_CLK: R23.1 R150.2 R151.1 TP34.1 | length 76.2
  F.Cu w0.127: v1(79.75,55.32) 80.32,54.75 R151.1@80.32,54.72 80.32,54.31 R150.2@80,53.99 ; v1(119.33,60.31) 118.99,59.97 118.99,34.99 120.81,33.17 R23.1@121.78,33.17
  In4.Cu w0.127: v1(79.75,55.32) 87.9,63.47 116.17,63.47 v1(119.33,60.31)
  B.Cu w0.127: TP34.1@78.5,55.32 v1(79.75,55.32)
MIX_EN: C29.2 TP37.1 U9.1 U10.2 U26.6 U39.1 | length 32.4
  F.Cu w0.127: U10.2@96.25,28.02 v1(97,28.02) 99.09,28.02 99.74,27.37 U39.1@100.65,27.37 108.45,27.37 v1(108.87,26.95) ; v1(111.36,26.95) 111.73,27.32 U26.6@112.012,27.32 U26.6@111.72,27.32
  F.Cu w0.25: U9.1@87.4,35.32 87.65,35.57 v2(88.1,35.57)
  F.Cu w0.364: C29.2@88.08,36.07 88.1,36.05 v2(88.1,35.57)
  In4.Cu w0.127: v2(88.1,35.57) 88.75,34.92 91.3,34.92 93.1,33.12 93.1,30.92 96,28.02 v1(97,28.02) ; v1(108.87,26.95) v1(111.36,26.95)
  B.Cu w0.127: TP37.1@96.2,27.22 v1(97,28.02)
MIX_IN: C28.2 U6.5 | length 1.1
  F.Cu w0.25: U6.5@88.3,46.72 88.3,46.97
  F.Cu w0.364: C28.2@88.02,47.72 88.3,47.44 88.3,46.97
MIX_IN+: L1.1 T1.4 U4.23 | length 2.2
  F.Cu w0.25: L1.1@85.68,50.12 85.75,50.19 U4.23@85.75,51.17
  F.Cu w0.3: T1.4@85.505,49.07 85.505,49.295 85.65,49.44 85.65,50.09 L1.1@85.68,50.12
MIX_IN-: L1.2 T1.3 U4.24 | length 2.2
  F.Cu w0.25: U4.24@86.25,51.17 86.25,50.19 L1.2@86.32,50.12
  F.Cu w0.3: L1.2@86.32,50.12 86.35,50.09 86.35,49.44 86.495,49.295 T1.3@86.495,49.07
MIX_OUT: C46.1 U5.5 | length 0.9
  F.Cu w0.25: 94.39,52.62 U5.5@94.65,52.62
  F.Cu w0.364: C46.1@93.73,52.62 94.39,52.62
MIX_OUT+: C114.2 L3.2 L6.2 R124.2 T2.3 U4.28 | length 4.5
  F.Cu w0.25: U4.28@86.95,53.37 87.34,53.37 87.44,53.47
  F.Cu w0.3: 87.44,53.47 91.205,53.47 T2.3@91.35,53.615
MIX_OUT-: C114.1 C198.1 L30.2 R43.2 T2.4 U4.27 | length 4.5
  F.Cu w0.25: U4.27@86.95,52.87 87.34,52.87 87.44,52.77
  F.Cu w0.3: 87.44,52.77 91.205,52.77 T2.4@91.35,52.625
MIXER.ENBL: C109.1 U4.1 U23.P1 | length 71.2
  F.Cu w0.127: U4.1@86.25,56.07 86.25,56.63 86.17,56.71 86.17,57.03 C109.1@86.1,57.1 86.12,57.1 86.55,57.53 v1(86.55,59.05) ; v1(141.89,52.94) 144.01,52.94 144.92,52.03 145.43,52.03 146.44,51.02 U23.P1@146.8,51.02
  In4.Cu w0.127: v1(86.55,59.05) 89.68,62.18 113.98,62.18 117.136,59.024 125.506,59.024 127.78,56.75 129.482,56.75 133.22,53.012 133.22,51.98 133.71,51.49 137.74,51.49 139.19,52.94 v1(141.89,52.94)
MIXER.LD: U4.26 U23.M7 | length 75
  F.Cu w0.127: U4.26@86.95,52.37 87.01,52.31 v1@87.65,52.31 ; v2(148,46.62) U23.M7@148.4,46.22
  In4.Cu w0.127: 87.7,52.26 87.7,55.07 93.51,60.88 113.45,60.88 120.846,53.484 120.846,52.004 121.67,51.18 126.551,51.18 129.841,47.89 138.61,47.89 140.36,49.64 144.63,49.64 147.65,46.62 v2(148,46.62)
  other v1: 87.69,52.26
MIXER.SCLK: C36.1 U4.31 U23.L7 | length 73.3
  F.Cu w0.127: U4.31@86.95,54.87 87.22,54.87 87.541,55.19 87.541,57.141 C36.1@87.9,57.5 87.91,57.5 88.35,57.94 v1(88.35,59.05) ; v2(148.8,46.62) U23.L7@149.2,46.22
  In4.Cu w0.127: v1(88.35,59.05) 90.96,61.66 113.769,61.66 116.919,58.51 119.68,58.51 121.67,56.52 125.2,56.52 131.82,49.9 144.73,49.9 147.61,47.02 148.4,47.02 v2(148.8,46.62)
MIXER.SDATA: C37.1 U4.32 U23.M6 | length 73.4
  F.Cu w0.127: U4.32@86.95,55.37 87,55.42 C37.1@87,57.1 87.02,57.1 87.45,57.53 v1(87.45,59.05) ; v2(148,47.42) U23.M6@148.4,47.02
  In4.Cu w0.127: v1(87.45,59.05) 90.32,61.92 113.868,61.92 117.018,58.77 125.29,58.77 125.92,58.14 125.92,56.159 131.919,50.16 144.83,50.16 147.57,47.42 v2(148,47.42)
MIXER.{\E\N\}\: C35.1 U4.30 U23.N7 | length 72.4
  F.Cu w0.127: U4.30@86.95,54.37 87.22,54.37 87.8,54.95 87.8,56.756 88.394,57.35 88.65,57.35 C35.1@88.8,57.5 88.81,57.5 89.25,57.94 v1(89.25,59.05) ; v1(137.64,49.37) 138.38,48.63 138.38,47.73 140.09,46.02 146.44,46.02 146.64,45.82 147.2,45.82 U23.N7@147.6,46.22
  In4.Cu w0.127: v1(89.25,59.05) 91.6,61.4 113.67,61.4 116.82,58.25 119.58,58.25 121.57,56.26 125.1,56.26 131.99,49.37 v1(137.64,49.37)
MIXER.{\R\E\S\E\T\}\: C34.1 R5.2 U4.29 U23.N8 | length 73.9
  F.Cu w0.127: U4.29@86.95,53.87 87.21,53.87 88.054,54.714 88.054,56.651 88.483,57.08 89.28,57.08 C34.1@89.7,57.5 89.71,57.5 90.55,58.34 R5.2@90.55,58.38 v1(90.55,59.05) ; v1(137.95,48.31) 137.95,46.96 139.99,44.92 146.54,44.92 146.64,45.02 147.2,45.02 U23.N8@147.6,45.42
  In4.Cu w0.127: v1(90.55,59.05) 92.64,61.14 113.55,61.14 121.1,53.59 121.1,52.11 121.77,51.44 126.65,51.44 129.93,48.16 137.41,48.16 137.56,48.31 v1(137.95,48.31)
MODE: R51.1 U21.2 U23.J2 | length 46.1
  F.Cu w0.127: U23.J2@150.8,50.22 151.2,50.62 151.2,51.42 150.21,52.41 150.21,61.07 153.4,64.26 153.4,69.099 154.45,70.149 v1(154.45,70.52) ; v1(159.15,81.07) 160.03,81.07 R51.1@160.2,80.9 ; v1@166,83.45 U21.2@166,84.22
  In4.Cu w0.127: v1(154.45,70.52) 155.91,70.52 158.84,73.45 158.84,80.76 v1(159.15,81.07) 162.05,83.97 165.48,83.97 166,83.45
  other v1: 166,83.48
Net-(C13-Pad1): C13.1 R1.1 R2.2 | length 1.5
  F.Cu w0.25: C13.1@80.6,57.9 80.68,57.82 R1.1@81.38,57.82 R2.2@81.38,58.52
Net-(C15-Pad2): C15.2 R3.2 | length 0.7
  F.Cu w0.25: C15.2@82.8,58.54 R3.2@83.5,58.54
Net-(C45-Pad2): C45.2 R26.1 | length 0.7
  F.Cu w0.25: R26.1@107.15,29.85 107.18,29.82 C45.2@107.88,29.82
Net-(C50-Pad2): C50.2 R152.1 | length 0.7
  F.Cu w0.364: R152.1@83.42,31.87 C50.2@83.42,32.57
Net-(C54-Pad1): C54.1 L8.1 L14.2 | length 1.5
  F.Cu w0.364: L8.1@90.57,40.67 90.63,40.61 C54.1@90.63,39.97 90.6,39.94 L14.2@90.6,39.24
Net-(C56-Pad1): C56.1 L14.1 L15.2 | length 1.5
  F.Cu w0.364: L15.2@89.17,38.57 89.87,38.57 C56.1@89.9,38.54 90.54,38.54 L14.1@90.6,38.6
Net-(C67-Pad1): C67.1 R150.1 | length 0.7
  F.Cu w0.127: R150.1@80,53.35 C67.1@80.7,53.35
Net-(C78-Pad2): C78.2 R115.2 | length 0.8
  F.Cu w0.364: R115.2@79.52,29.67 C78.2@80.28,29.67
Net-(C101-Pad1): C91.2 C101.1 L16.1 | length 1.5
  F.Cu w0.364: C101.1@83.6,41.69 83.63,41.72 L16.1@84.33,41.72 ; L16.1@84.3,41.75 L16.1@84.33,41.72 ; C91.2@85.03,41.72 L16.1@84.33,41.72
Net-(C101-Pad2): C101.2 C103.1 L18.1 | length 1.4
  F.Cu w0.364: L18.1@83.57,40.32 83.57,39.68 C103.1@83.63,39.62 ; L18.1@83.6,40.35 C101.2@83.6,41.05
Net-(C103-Pad2): C96.1 C103.2 L17.1 | length 1.5
  F.Cu w0.364: C103.2@84.27,39.62 84.97,39.62 L17.1@85,39.59 85.03,39.62 C96.1@85.73,39.62
Net-(C112-Pad1): C112.1 R35.2 | length 0.8
  F.Cu w0.364: C112.1@71.32,32.92 71.55,32.69 R35.2@71.55,32.19
Net-(C112-Pad2): C112.2 L13.1 L19.2 | length 2.5
  F.Cu w0.364: L19.2@69.45,32.19 L13.1@69.45,33.283 70.317,33.282 C112.2@70.68,32.92
Net-(C115-Pad1): C115.1 R149.1 | length 0.8
  F.Cu w0.127: C115.1@111.32,34.07 R149.1@112.08,34.07
Net-(C139-Pad1): C139.1 L12.1 L26.2 R128.1 R129.2 | length 3.9
  F.Cu w0.364: C139.1@73.9,40.3 75.07,40.3 L26.2@75.1,40.27 75.13,40.3 R128.1@76.3,40.3 R129.2@76.3,39.54 L12.1@77,39.54
Net-(C139-Pad2): C139.2 R131.2 | length 0.8
  F.Cu w0.364: C139.2@73.9,40.94 R131.2@73.9,41.7
Net-(C188-Pad1): C188.1 C189.2 R155.2 | length 7.6
  F.Cu w0.364: C188.1@76.1,48.9 C188.1@76.12,48.92 76.82,48.92 R155.2@76.85,48.95 C189.2@81.68,44.12
Net-(C191-Pad1): C191.1 L27.2 L28.1 R132.1 R133.2 | length 4.1
  F.Cu w0.364: R132.1@73.05,51.05 73.27,50.83 74.04,50.83 L27.2@74.25,50.62 74.31,50.62 74.72,50.21 C191.1@74.72,49.62 R133.2@75.48,49.62 L28.1@75.48,50.32
Net-(C191-Pad2): C191.2 R130.2 | length 1
  F.Cu w0.364: R130.2@73.05,49.65 73.08,49.62 C191.2@74.08,49.62
Net-(C192-Pad2): C192.2 R134.2 | length 0.8
  F.Cu w0.364: C192.2@75.45,51.69 R134.2@75.45,52.45
Net-(C195-Pad1): C195.1 L33.2 L34.1 R137.1 R138.2 | length 4.2
  F.Cu w0.364: L34.1@76.12,53.82 R138.2@76.12,54.52 76.82,54.52 R137.1@76.85,54.49 C195.1@76.85,55.25 77.03,55.25 77.55,55.77 77.55,56.17 78,56.62 L33.2@78.05,56.62
Net-(C195-Pad2): C195.2 R136.2 | length 0.7
  F.Cu w0.364: C195.2@76.85,55.89 R136.2@76.85,56.59
Net-(C198-Pad2): C198.2 R142.2 | length 0.8
  F.Cu w0.3: C198.2@88.25,52.1 88.48,51.87 R142.2@88.48,51.37
Net-(C202-Pad1): C202.1 R147.1 | length 1.2
  F.Cu w0.3: C202.1@90.52,54.87 90.72,54.87 R147.1@91.45,55.6
Net-(C202-Pad2): C202.2 L2.2 L3.1 R124.1 R144.1 | length 3.7
  F.Cu w0.3: L2.2@88.65,56.07 88.65,55.87 89.12,55.4 R144.1@89.12,54.87 ; R124.1@89.65,54.14 L3.1@88.95,54.14 89.12,54.31 R144.1@89.12,54.87 ; C202.2@89.88,54.87 R144.1@89.12,54.87
Net-(C203-Pad1): C203.1 L29.2 L30.1 R43.1 R142.1 | length 3.7
  F.Cu w0.3: L29.2@88.65,50.17 88.65,50.37 89.12,50.84 R142.1@89.12,51.37 ; R43.1@89.65,52.1 L30.1@88.95,52.1 89.12,51.93 R142.1@89.12,51.37 ; C203.1@89.88,51.37 R142.1@89.12,51.37
Net-(C203-Pad2): C203.2 R143.2 | length 0.9
  F.Cu w0.3: C203.2@90.52,51.37 91.42,51.37 R143.2@91.45,51.34
Net-(C207-Pad1): C207.1 L5.2 L32.1 R117.1 R154.2 | length 4.7
  F.Cu w0.364: R154.2@82.62,31.07 L32.1@82.62,30.37 83.45,30.37 L5.2@83.65,30.57 ; R117.1@83.38,29.37 83.38,30.3 L5.2@83.65,30.57 ; C207.1@84.48,31.77 84.48,31.625 83.65,30.795 L5.2@83.65,30.57
Net-(C207-Pad2): C207.2 R146.2 | length 0.8
  F.Cu w0.364: C207.2@85.12,31.77 R146.2@85.88,31.77
Net-(C210-Pad1): C210.1 L4.2 L31.1 R116.1 R153.2 | length 4.4
  F.Cu w0.364: L31.1@76.93,31.82 R153.2@76.93,31.12 76.93,30.29 L4.2@77.1,30.12 77.1,30.11 78.33,28.88 C210.1@78.33,28.72 78.3,28.69 R116.1@78.3,27.99
Net-(C210-Pad2): C210.2 R42.2 | length 0.7
  F.Cu w0.364: C210.2@78.97,28.72 79,28.69 R42.2@79,27.99
Net-(C211-Pad2): C211.2 R123.2 | length 0.8
  F.Cu w0.364: R123.2@75.45,55.89 C211.2@75.45,56.65
Net-(D1-A1): C64.2 D1.1 L13.2 P3.1 | length 7.3
  F.Cu w0.24: 66.17,34.81 66.82,34.81
  F.Cu w0.364: P3.1@63.65,34.82 66.21,34.82 ; 66.79,34.82 L13.2@69.213,34.82 ; L13.2@69.4,35.007 L13.2@69.487,34.92 ; L13.2@69.45,34.857 69.513,34.92 C64.2@70.97,34.92
Net-(D2-A): D2.2 R18.1 TP10.1 | length 3.5
  F.Cu w0.127: D2.2@61.6,62.223 61.697,62.32 R18.1@62.98,62.32 63,62.3 v1(63,61.42)
  B.Cu w0.127: v1(63,61.42) TP10.1@64.2,61.42
Net-(D4-A1): D4.1 R72.1 TP12.1 | length 3.2
  F.Cu w0.127: D4.1@61.82,56.526 61.826,56.52 R72.1@62.98,56.52 62.98,57.1 v1(63,57.12)
  B.Cu w0.127: TP12.1@62.8,56.02 63.3,56.52 63.3,56.82 v1(63,57.12)
Net-(D4-A2): D4.3 R125.1 TP11.1 | length 3.3
  F.Cu w0.127: D4.3@61.6,57.601 61.719,57.72 R125.1@62.98,57.72 62.98,58.3 v1(63,58.32)
  B.Cu w0.127: v1(63,58.32) 64.1,58.32 TP11.1@64.2,58.42
Net-(D5-A): D5.2 R73.1 TP13.1 | length 3
  F.Cu w0.127: D5.2@61.6,53.079 61.641,53.12 R73.1@62.79,53.12 62.79,53.03 63.3,52.52 v1(63.3,52.42)
  B.Cu w0.127: v1(63.3,52.42) TP13.1@64.2,52.42
Net-(D6-A2): D6.3 R74.1 TP14.1 | length 3.3
  F.Cu w0.127: D6.3@61.6,48.457 61.663,48.52 R74.1@62.98,48.52 63,48.5 v1(63,47.82)
  B.Cu w0.127: v1(63,47.82) TP14.1@64.2,47.82
Net-(D7-A1): D7.1 R75.1 TP8.1 | length 3
  F.Cu w0.127: D7.1@61.82,78.32 62.59,78.32 R75.1@62.79,78.12 62.79,77.43 v1(62.8,77.42)
  B.Cu w0.127: TP8.1@62.8,76.22 v1(62.8,77.42)
Net-(D7-A2): D7.3 R50.1 TP7.1 | length 4.2
  F.Cu w0.127: D7.3@61.6,79.395 61.875,79.12 R50.1@62.79,79.12 62.79,79.81 v1(62.8,79.82)
  B.Cu w0.127: v1@62.7,79.82 v1(62.8,79.82) 62.8,79.42 63.5,78.72 TP7.1@64.2,78.72
Net-(D8-A1): D8.1 R76.1 TP9.1 | length 3
  F.Cu w0.127: D8.1@61.82,65.67 61.87,65.72 R76.1@62.98,65.72 63,65.7 v1(63,65.12)
  B.Cu w0.127: v1(63,65.12) 64.1,65.12 TP9.1@64.2,65.22
Net-(D10-A): C171.1 D10.2 U24.6 | length 2.2
  F.Cu w0.364: D10.2@69.5,27.895 C171.1@69.5,27.1 69.55,27.1 70.08,26.57 U24.6@70.64,26.57
Net-(D11-K): C143.1 D11.1 D12.1 D13.1 FB1.2 | length 0.1
  F.Cu w0.8: C143.1@166.65,80.52 C143.1@166.75,80.42
Net-(D13-A): D13.2 Q5.3
Net-(D14-K): C64.1 C68.2 D14.1 D15.2 | length 2.1
  F.Cu w0.24: 73.313,34.895 73.328,34.91 D15.2@73.65,34.91 73.952,34.91 73.962,34.92
  F.Cu w0.364: 72.22,34.895 73.313,34.895 ; 73.962,34.92 C68.2@74.33,34.92
Net-(D15-K): C69.1 D15.1 Q1.6 R29.1 | length 5.5
  F.Cu w0.127: R29.1@72.6,32.24 v1(72.6,32.82)
  F.Cu w0.364: 73.65,34.36 C69.1@73.65,33.89 73.67,33.87 v1(74.15,33.87) 74.6,33.42 74.6,32.69 75.01,32.28
  In4.Cu w0.127: v1(72.6,32.82) 73.1,32.82 v1(74.15,33.87)
Net-(D16-A): D16.2 R89.1 | length 1.1
  F.Cu w0.127: D16.2@177.45,82.02 177.45,81.18 R89.1@177.6,81.03
Net-(D16-K): D16.1 R81.2 R86.1 R88.2 | length 2.9
  F.Cu w0.127: R86.1@177.77,84.67 R81.2@177.77,83.97 177.77,83.56 R88.2@178.21,83.12 178.15,83.06 D16.1@178.15,82.02
Net-(D17-A): D17.2 R91.1 | length 0.8
  F.Cu w0.127: D17.2@160.95,76.62 R91.1@161.79,76.62
Net-(D17-K): D17.1 R83.2 R87.1 R90.2 | length 25.7
  F.Cu w0.127: D17.1@160.25,76.62 160.25,75.68 R90.2@160.3,75.63 160.35,75.63 161.08,74.9 v1(161.08,74.53) ; v1(177.75,86.22) 177.75,86.8 R83.2@177.77,86.82 R87.1@177.77,87.52
  In4.Cu w0.127: v1(161.08,74.53) 163.86,74.53 168.18,78.85 171.04,78.85 177.75,85.56 v1(177.75,86.22)
Net-(FL2-IN): FL2.1 U2.11 | length 1.5
  F.Cu w0.364: FL2.1@92.762,32.57 92.763,32.583 93.5,33.32 93.99,33.32
Net-(FL3-IN): FL3.1 U2.9 | length 1.7
  F.Cu w0.364: 94.8,34.63 FL3.1@94.8,36.357
Net-(JP1-A): JP1.1 U23.L14 | length 20.2
  F.Cu w0.127: JP1.1@144.1,24.32 144.1,24.84 v1(144.72,25.46) ; v1(147.85,38.92) 148.24,38.92 149.2,39.88 U23.L14@149.2,40.62
  In4.Cu w0.127: v1(144.72,25.46) 143.67,26.51 143.67,32.68 144.6,33.61 145.732,33.61 147.85,35.728 v1(147.85,38.92)